# Altium PCB CNC Machine Breakout.PcbDoc
Units mil, origin at the board's own origin, x right, y up, seen from the top; angles counter-clockwise.
Board outline 6000 x 4000 mil, 2 copper layers (Top Layer, Bottom Layer); 44 components, 74 nets, 227 pads, 85 vias.
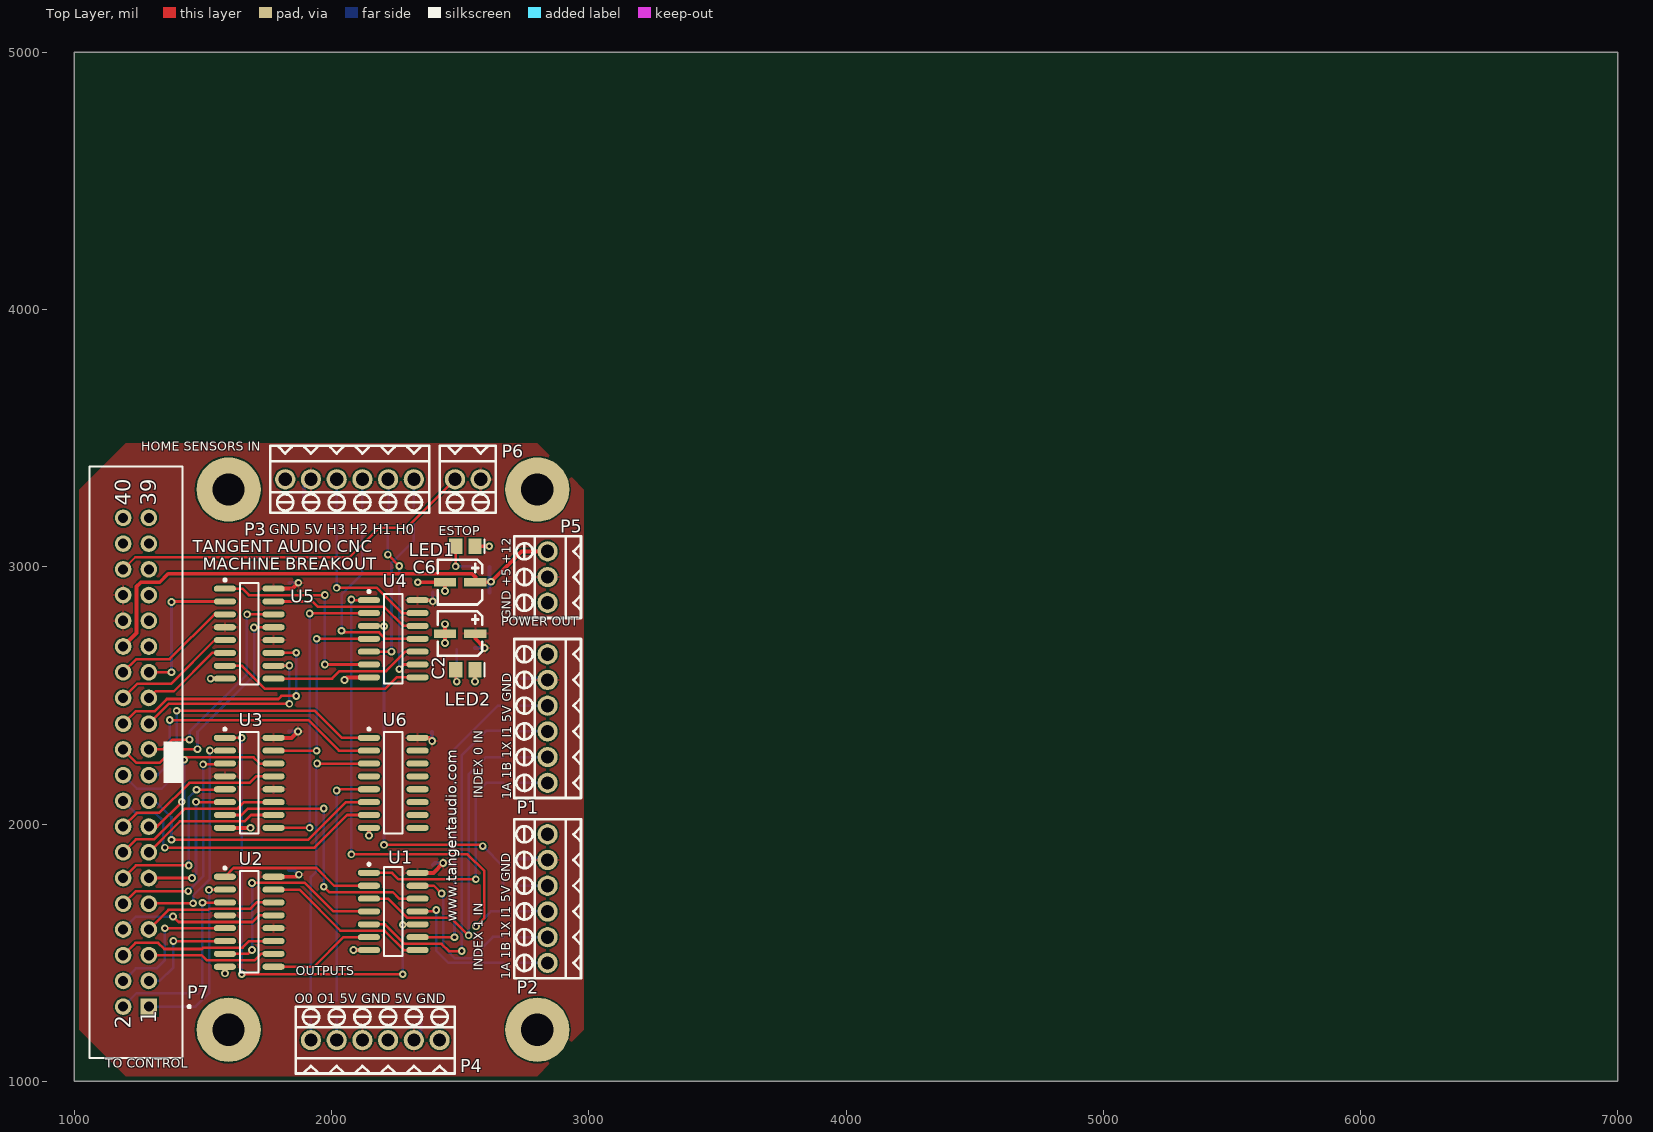
[diagram p0: Top Layer view]
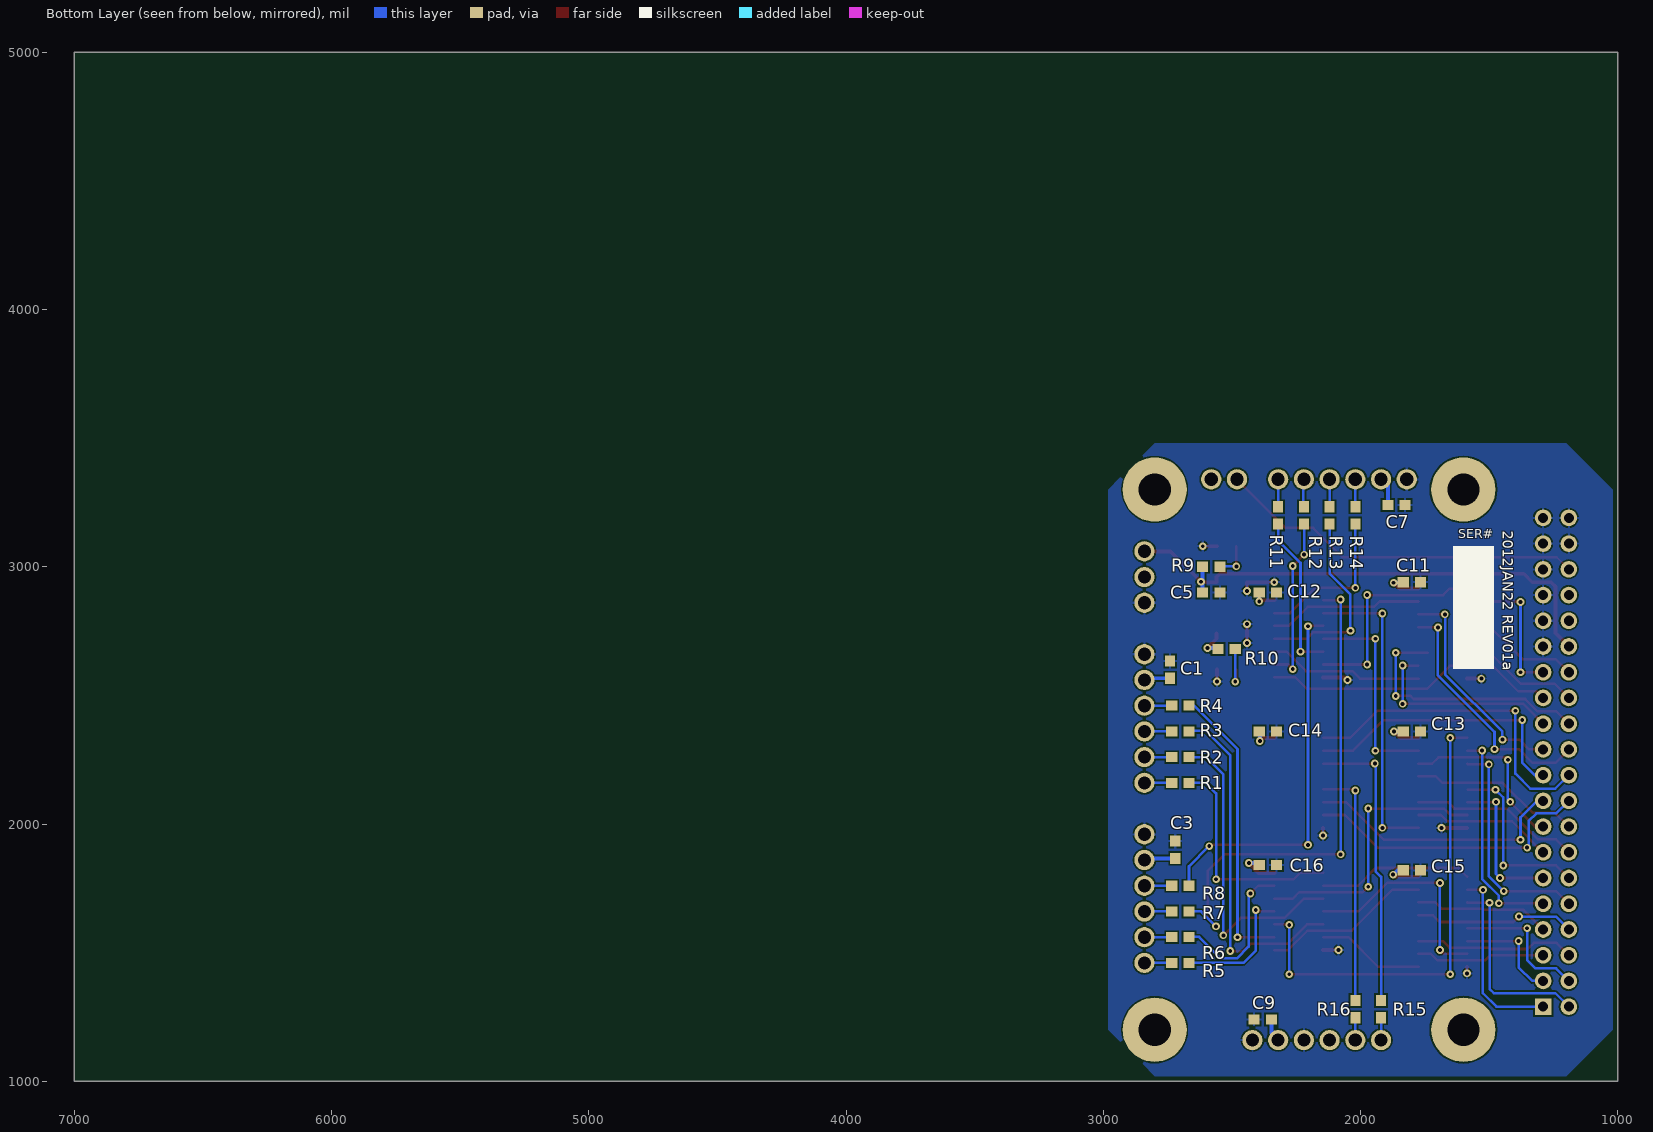
[diagram p1: Bottom Layer view, seen from below]

## Layer stack, top to bottom
Top Layer: signal copper 1.4
Dielectric: dielectric 12.6, FR-4, Dk 4.8
Bottom Layer: signal copper 1.4

## Board outline
1000,1000 7000,1000 7000,5000 1000,5000

## Design rules (kind name [scope] priority, off if disabled: settings)
Clearance [All] p1: gap=6
ComponentClearance [All] p1: gap=10 collisioncheckmode=3 verticalgap=10
HoleSize [All] p1: absolutevalues=TRUE maxlimit=125 minlimit=13 maxpercent=80.000 minpercent=20.000
MinimumAnnularRing [All] p1: minimumring=7
PolygonConnect [All] p1: connectstyle=Relief reliefconductorwidth=10 reliefentries=4 polygonreliefangle="90 Angle"
RoutingVias [All] p1: holewidth=20 width=30 viastyle="Through Hole" minholewidth=20 minwidth=30 maxholewidth=20 maxwidth=30
SolderMaskExpansion [All] p1: expansion=4
TestPointUsage [All] p1: valid=0 allowmultiple=FALSE
Testpoint [All] p1: side=15 testpointundercomponent=TRUE minsize=40 maxsize=100 preferedsize=60 minholesize=0 maxholesize=40 preferedholesize=32 testpointgrid=1 style=1023 order=0123456789
Width [All] p1: maxlimit=30 minlimit=6 preferedwidth=8 minimp=50.000000 maximp=50.000000 favimp=50.000000
17 further rules are at their usual default settings.

## Components (designator, comment, footprint, x,y, rotation, side; value= is the part's Value field where it differs from the comment)
C1 "Cap Semi" 1608[0603] 2740,2600 r90 bottom
C2 "Cap Pol3" Panasonic_HA_B 2500,2740 r0 top
C3 "Cap Semi" 1608[0603] 2720,1900 r90 bottom
C5 "Cap Semi" 1608[0603] 2580,2900 r180 bottom
C6 "Cap Pol3" Panasonic_HA_B 2500,2940 r0 top
C7 "Cap Semi" 1608[0603] 1860,3240 r180 bottom
C9 "Cap Semi" 1608[0603] 2380,1240 r0 bottom
C11 "Cap Semi" 1608[0603] 1800,2940 r180 bottom
C12 "Cap Semi" 1608[0603] 2360,2900 r180 bottom
C13 "Cap Semi" 1608[0603] 1800,2360 r180 bottom
C14 "Cap Semi" 1608[0603] 2360,2360 r180 bottom
C15 "Cap Semi" 1608[0603] 1800,1820 r180 bottom
C16 "Cap Semi" 1608[0603] 2360,1840 r180 bottom
LED1 "LED3" CD2012-0805 2520,3080 r0 top
LED2 "LED3" CD2012-0805 2520,2600 r0 top
P1 "Header 6" OSTVN06A150 2840,2160 r90 top
P2 "Header 6" OSTVN06A150 2840,1460 r90 top
P3 "Header 6" OSTVN06A150 2320,3340 r180 top
P4 "Header 6" OSTVN06A150 1920,1160 r0 top
P5 "Header 3" OSTVN03A150 2840,2860 r90 top
P6 "Header 2" OSTVN02A150 2580,3340 r180 top
P7 "Header 20X2" IDC2.54-V40D 1240,2240 r90 top
R1 "Res3" J1-0603 2700,2160 r180 bottom
R2 "Res3" J1-0603 2700,2260 r180 bottom
R3 "Res3" J1-0603 2700,2360 r180 bottom
R4 "Res3" J1-0603 2700,2460 r180 bottom
R5 "Res3" J1-0603 2700,1460 r180 bottom
R6 "Res3" J1-0603 2700,1560 r180 bottom
R7 "Res3" J1-0603 2700,1660 r180 bottom
R8 "Res3" J1-0603 2700,1760 r180 bottom
R9 "Res3" J1-0603 2580,3000 r180 bottom
R10 "Res3" J1-0603 2520,2680 r180 bottom
R11 "Res3" J1-0603 2320,3200 r270 bottom
R12 "Res3" J1-0603 2220,3200 r270 bottom
R13 "Res3" J1-0603 2120,3200 r270 bottom
R14 "Res3" J1-0603 2020,3200 r270 bottom
R15 "Res3" J1-0603 1920,1280 r90 bottom
R16 "Res3" J1-0603 2020,1280 r90 bottom
U1 "74ACT14SC" M14A_N 2240,1660 r0 top
U2 "MC3487D" D016_N 1680,1620 r0 top
U3 "MC3487D" D016_N 1680,2160 r0 top
U4 "74ACT14SC" M14A_N 2240,2720 r0 top
U5 "MC3487D" D016_N 1680,2740 r0 top
U6 "MC3486D" D016_N 2240,2160 r0 top

## Footprints (in the part's own frame and the unit in brackets; to place one, negate y for a bottom-side part, rotate by r counter-clockwise, add the part's x,y. Pads: shape width x height; smd on the part's side, far side on the other; paste and mask are expansions set on the pad)
1608[0603] [mm] "Chip Capacitor; Body 1.6 x 0.8 mm (LxW typ)"
  rect 1.1x1 smd: 1(-0.85,0) 2(0.85,0)
CD2012-0805 [mm] "Chip Diode; Body 2.0 x 1.3 mm (LxW typ)"
  rect 1.3x1.5 smd: 1(-0.95,0) 2(0.95,0)
  silkscreen extent 1.9,-0.65 1.9,0.65
D016_N [mm] "SOIC, 16-Leads, Body 9.9x3.9mm, Pitch 1.27mm, IPC Medium Density"
  oval 2.2x0.6 smd: 1(-2.4,4.445) 2(-2.4,3.175) 3(-2.4,1.905) 4(-2.4,0.635) 5(-2.4,-0.635) 6(-2.4,-1.905) 7(-2.4,-3.175) 8(-2.4,-4.445) 9(2.4,-4.445) 10(2.4,-3.175) 11(2.4,-1.905) 12(2.4,-0.635) 13(2.4,0.635) 14(2.4,1.905) 15(2.4,3.175) 16(2.4,4.445)
  silkscreen extent -2.52,-5 0.9,5.42, body extent -1.95,-4.95 1.95,4.95, height 1.75
IDC2.54-V40D [mm] "Connector; IDC, Low Profile Male Header, Thru-Hole; 40 Position; Vertical; Pitch 2.54 mm; Body 58.42 x 9.2 x 9.45 mm (LxWxH)"
  rect 1.65x1.65 hole 1: 1(-24.13,-1.27)
  round 1.65 hole 1: 2(-24.13,1.27) 3(-21.59,-1.27) 4(-21.59,1.27) 5(-19.05,-1.27) 6(-19.05,1.27) 7(-16.51,-1.27) 8(-16.51,1.27) 9(-13.97,-1.27) 10(-13.97,1.27) 11(-11.43,-1.27) 12(-11.43,1.27) 13(-8.89,-1.27) 14(-8.89,1.27) 15(-6.35,-1.27) 16(-6.35,1.27) 17(-3.81,-1.27) 18(-3.81,1.27) 19(-1.27,-1.27) 20(-1.27,1.27) 21(1.27,-1.27) 22(1.27,1.27) 23(3.81,-1.27) 24(3.81,1.27) 25(6.35,-1.27) 26(6.35,1.27) 27(8.89,-1.27) 28(8.89,1.27) 29(11.43,-1.27) 30(11.43,1.27) 31(13.97,-1.27) 32(13.97,1.27) 33(16.51,-1.27) 34(16.51,1.27) 35(19.05,-1.27) 36(19.05,1.27) 37(21.59,-1.27) 38(21.59,1.27) 39(24.13,-1.27) 40(24.13,1.27)
  silkscreen extent -29.21,-5.38 29.21,4.6, body extent -29.21,-4.6 29.21,4.6, height 9.45
J1-0603 [mm] "Chip Resistor; Body 1.6 x 0.8 mm (LxW typ)"
  rect 1.1x1 smd: 1(-0.85,0) 2(0.85,0)
M14A_N [mm] "SOIC, 14-Leads, Body 8.6x3.9mm, Pitch 1.27mm, IPC Medium Density"
  oval 2.2x0.6 smd: 1(-2.4,3.81) 2(-2.4,2.54) 3(-2.4,1.27) 4(-2.4,0) 5(-2.4,-1.27) 6(-2.4,-2.54) 7(-2.4,-3.81) 8(2.4,-3.81) 9(2.4,-2.54) 10(2.4,-1.27) 11(2.4,0) 12(2.4,1.27) 13(2.4,2.54) 14(2.4,3.81)
  silkscreen extent -2.52,-4.4 0.9,4.78, body extent -1.95,-4.33 1.95,4.33, height 1.75
OSTVN02A150 [mm]
  round 2 hole 1.3: 1(0,0) 2(2.54,0)
  silkscreen extent -1.5,-3.3 4.04,3.3
OSTVN03A150 [mm]
  round 2 hole 1.3: 1(0,0) 2(2.54,0) 3(5.08,0)
  silkscreen extent -1.5,-3.3 6.58,3.3
OSTVN06A150 [mm] "On-Shore Technology 2.54mm Screw Terminal"
  round 2 hole 1.3: 1(0,0) 2(2.54,0) 3(5.08,0) 4(7.62,0) 5(10.16,0) 6(12.7,0)
  silkscreen extent -1.5,-3.3 14.2,3.3
Panasonic_HA_B [mm]
  rect 2.2x0.85 smd: 1(1.5,0) 2(-1.5,0)
  silkscreen extent -2.2,-2.2 2.2,2.2

## Part data
C1 C3 C5 C7 C9 C11 C12 C13 C14 C15 C16: "Capacitor (Semiconductor SIM Model)"
C2 C6: "Polarized Capacitor (Surface Mount)"
LED1 LED2: "Typical BLUE SiC LED"
P1 P2 P3 P4: "Header, 6-Pin"
P5: "Header, 3-Pin"
P6: "Header, 2-Pin"
P7: "Header, 20-Pin, Dual row"
R1 R2 R3 R4 R5 R6 R7 R8 R9 R10 R11 R12 R13 R14 R15 R16: "Resistor"
U1 U4: "Hex Inverter with Schmitt Trigger Input"
U2 U3 U5: "Quadruple Differential Line Driver with 3-State Output"
U6: "Quadruple Line Receiver with 3-State Output"

## Free pads (board coordinates)
  round 250 hole 125: ""(1600,1200) ""(1600,3300) ""(2800,1200) ""(2800,3300)

## Via types
v1: diameter 30, hole 15, Top Layer to Bottom Layer, 73 vias
v2: diameter 30, hole 15, Top Layer to Bottom Layer, tented both sides, 12 vias

## Nets (pads, with @x,y where several pads share a name; then routed paths per layer and width w, separated by ;. In a path a pad name is that pad's centre, name@x,y a point inside that pad or via, vN(x,y) a via of type N, cw(c..) or ccw(c..) an arc to the next point about the centre after c; other vN are vias at no path point)
+12V: C5.1 C6.1 P5.3 P7.30 R9.1 | length 2054.8
  Top Layer w15: P7.30 1242,2742 1242,2923 1259,2940 1332,2940 1365,2973 2546,2973 2559.06,2959.94 C6.1 2618,2940 2738,3060 P5.3
  Bottom Layer w15: C5.1 R9.1 ; v2@2613.46,2942 v2(2620,2942)
ENC0_A_IN: P1.1 R1.1 | length 106.5
  Bottom Layer w10: R1.1 P1.1
ENC0_B_IN: P1.2 R2.1 | length 106.5
  Bottom Layer w10: R2.1 P1.2
ENC0_IDX_IN: P1.3 R3.1 | length 106.5
  Bottom Layer w10: R3.1 P1.3
ENC1_A_IN: P2.1 R5.1 | length 106.5
  Bottom Layer w10: R5.1 P2.1
ENC1_B_IN: P2.2 R6.1 | length 106.5
  Bottom Layer w10: R6.1 P2.2
ENC1_IDX_IN: P2.3 R7.1 | length 106.5
  Bottom Layer w10: R7.1 P2.3
GND: C1.2 C2.2 C3.2 C5.2 C6.2 C7.2 C9.2 C11.2 C12.2 C13.2 C14.2 C15.2 C16.2 LED1.2 LED2.2 P1.6 P2.6 P3.6 P4.4 P4.6 P5.1 P7.29 P7.31 P7.33 P7.35 P7.37 P7.38 P7.39 P7.40 U1.7 U2.8 U3.8 U4.7 U5.8 U6.8 | length 685.2
  Top Layer w15: v1(1530,2565) U5.8 ; v1(1585.51,1419.49) U2.8 ; U3.8 v2(1685,1985) ; v1(2050,2560) 2060,2570 U4.7 ; v1(2085,1510) U1.7 ; v1(2145.51,1955.51) U6.8 ; v1(2335,2940) C6.2 v1(2440.95,2905.95) ; v1(2440.94,2703.94) v1(2440.94,2776.94) ; v1(2557.4,2553.6) LED2.2 ; LED1.2 v2(2613,3080)
HOME0_IN: P3.1 R11.1 | length 106.5
  Bottom Layer w10: R11.1 P3.1
HOME1_IN: P3.2 R12.1 | length 113
  Bottom Layer w10: R12.1@2222,3225 P3.2@2222,3338
HOME2_IN: P3.3 R13.1 | length 106.5
  Bottom Layer w10: R13.1 P3.3
HOME3_IN: P3.4 R14.1 | length 106.5
  Bottom Layer w10: R14.1 P3.4
MACHINE_ESTOP: P6.2 P7.36 | length 1435
  Top Layer w10: P7.36 1237,3037 2070,3037 2184,3151 2291,3151 P6.2
NetLED1_1: LED1.1 R9.2 | length 143.1
  Top Layer w10: v1(2482.6,3001.5) LED1.1
  Bottom Layer w10: v1@2484.1,3000 v1(2482.6,3001.5) R9.2@2545.04,3001.5
NetLED2_1: LED2.1 R10.2 | length 174.6
  Top Layer w10: LED2.1 2482.6,2557.47 v1(2486.54,2553.54)
  Bottom Layer w10: v1(2486.54,2553.54) R10.2
NetP7_1: P7.1 U2.2 | length 719.5
  Top Layer w10: v1(1524,1744) 1525,1745 U2.2
  Bottom Layer w10: P7.1 1472,1290 1524,1342 v1(1524,1744)
NetP7_2: P7.2 U2.3 | length 759.5
  Top Layer w10: v1(1498,1694) 1584.51,1694 U2.3
  Bottom Layer w10: P7.2 1242,1342 1481,1342 1498,1359 v1(1498,1694)
NetP7_3: P7.3 U2.6 | length 419.5
  Top Layer w10: v1(1385,1545) U2.6
  Bottom Layer w10: P7.3 1332,1390 1385,1443 v1(1385,1545)
NetP7_4: P7.4 U2.5 | length 552.5
  Top Layer w10: v1(1352,1595) U2.5
  Bottom Layer w10: P7.4 1239,1439 1319,1439 1352,1472 v1(1352,1595)
NetP7_5: P7.5 U2.10 | length 503.1
  Top Layer w10: P7.5 1495,1490 1515,1470 1701,1470 1726,1495 U2.10
NetP7_6: P7.6 U2.11 | length 627.2
  Top Layer w10: P7.6 1238,1538 1326,1538 1350,1514 1496,1514 1501,1519 1654,1519 1680,1545 U2.11
NetP7_7: P7.7 U2.14 | length 528
  Top Layer w10: P7.7 1366,1666 1520,1666 1525,1671 1685,1671 1709,1695 U2.14
NetP7_8: P7.8 U2.13 | length 624.7
  Top Layer w10: v1(1384,1640) 1405,1619 1692,1619 1718,1645 U2.13
  Bottom Layer w10: P7.8 1240,1640 v1(1384,1640)
NetP7_9: P7.9 U3.2 | length 852.7
  Top Layer w10: P7.9 1292,1692 v1(1462.06,1692) ; v1(1527,2286) 1528,2285 U3.2
  Bottom Layer w10: v1(1462.06,1692) 1462.06,1721.06 1527,1786 v1(1527,2286)
NetP7_10: P7.10 U3.3 | length 876.2
  Top Layer w10: P7.10 1239,1739 v1(1443.24,1739) ; v1(1501,2232) 1582.51,2232 U3.3
  Bottom Layer w10: v1(1443.24,1739) 1501,1796.76 v1(1501,2232)
NetP7_11: P7.11 U3.6 | length 582.8
  Top Layer w10: P7.11 v1(1457.47,1790) ; v1(1473,2086) 1474,2085 U3.6
  Bottom Layer w10: v1(1457.47,1790) 1473,1805.53 v1(1473,2086)
NetP7_12: P7.12 U3.5 | length 690.2
  Top Layer w10: P7.12 1239,1839 v1(1445,1839) ; v1(1475,2133) U3.5@1583.51,2133
  Bottom Layer w10: v1(1445,1839) 1445,2103 v1(1475,2133)
NetP7_13: P7.13 U3.10 | length 544.5
  Top Layer w10: P7.13 1410,2010 1662,2010 1687,2035 U3.10
NetP7_14: P7.14 U3.11 | length 665.3
  Top Layer w10: P7.14 1240,1940 1310,1940 1430,2060 1635,2060 1660,2085 U3.11
NetP7_15: P7.15 U3.14 | length 696.6
  Top Layer w10: P7.15 1322,1990 v1(1418,2086) ; v1(1427,2250) 1436,2259 1697,2259 1721,2235 U3.14
  Bottom Layer w10: v1(1418,2086) 1427,2095 v1(1427,2250)
NetP7_16: P7.16 U3.13 | length 665.3
  Top Layer w10: P7.16 1243,2043 1330,2043 1447,2160 1682,2160 1707,2185 U3.13
NetP7_17: P7.17 U6.6 | length 1029.5
  Top Layer w10: v1(1378,1939) 1910,1939 2056,2085 U6.6
  Bottom Layer w10: P7.17 1314,2090 1378,2026 v1(1378,1939)
NetP7_18: P7.18 U6.7 | length 1140.3
  Top Layer w10: v1(1352,1908) 1934,1908 2061,2035 U6.7
  Bottom Layer w10: P7.18 1239,2041 1316,2041 1346,2011 1346,1914 v1(1352,1908)
NetP7_19: P7.19 U6.2 | length 1090.7
  Top Layer w10: v1(1371,2404) 1910,2404 2029,2285 U6.2
  Bottom Layer w10: P7.19 1323,2190 1371,2238 v1(1371,2404)
NetP7_20: P7.20 U6.1 | length 1289.4
  Top Layer w10: v1(1398,2440) 1935,2440 2040,2335 U6.1
  Bottom Layer w10: P7.20 1243,2137 1339,2137 1398,2196 v1(1398,2440)
NetP7_21: P7.21 U5.14 | length 856
  Top Layer w10: P7.21 1344,2290 1382,2328 v1(1448,2328) ; v2(1672,2815) U5.14
  Bottom Layer w10: v1(1448,2328) 1448,2359 1671,2582 1671,2814 v2(1672,2815)
NetP7_22: P7.22 U5.13 | length 972.5
  Top Layer w10: P7.22 1242,2238 1331,2238 1384,2291 v1(1479,2291) ; v2(1699,2764) 1700,2765 U5.13
  Bottom Layer w10: v1(1479,2291) 1479,2358 1699,2578 v2(1699,2764)
NetP7_23: P7.23 U5.10 | length 787.4
  Top Layer w10: P7.23 1367,2467 v1(1836,2467) ; U5.10@1775.49,2616 v1(1836,2616)
  Bottom Layer w10: v1(1836,2467) v1(1836,2616)
NetP7_24: P7.24 U5.11 | length 1008.7
  Top Layer w10: P7.24 1239,2439 1313,2439 1360,2486 1793,2486 1805,2498 v1(1863,2498) ; U5.11@1739,2665 U5.11 ; U5.11@1775.49,2666 v1(1863,2666)
  Bottom Layer w10: v1(1863,2498) v1(1863,2666)
NetP7_25: P7.25 U5.6 | length 368
  Top Layer w10: P7.25 1316,2516 1387,2516 1536,2665 U5.6
NetP7_26: P7.26 U5.5 | length 488.7
  Top Layer w10: P7.26 1246,2546 1377,2546 1546,2715 U5.5
NetP7_27: P7.27 U5.2 | length 569.3
  Top Layer w10: P7.27 v1(1378,2590) ; v1(1378,2863) 1380,2865 U5.2
  Bottom Layer w10: v1(1378,2590) v1(1378,2863)
NetP7_28: P7.28 U5.3 | length 488.7
  Top Layer w10: P7.28 1241,2641 1371,2641 1545,2815 U5.3
NetR1_2: R1.2 U1.1 | length 882.4
  Top Layer w10: U1.1 2235,1810 2260,1785 v1(2561,1785)
  Bottom Layer w10: v1(2561,1785) 2561,2119 2602,2160 R1.2
NetR2_2: R2.2 U1.3 | length 1234
  Top Layer w10: U1.3 2220,1710 2295,1635 2465,1635 v1(2533,1567)
  Bottom Layer w10: v1(2533,1567) 2533,2193 2600,2260 R2.2
NetR3_2: R3.2 U1.5 | length 1365.3
  Top Layer w10: U1.5 2208,1610 2284,1534 2428,1534 2456,1506 v1(2506,1506)
  Bottom Layer w10: v1(2506,1506) 2506,2267 2601,2362 2664.54,2362 R3.2
NetR4_2: R4.2 U1.9 | length 1133
  Top Layer w10: U1.9 v1(2478,1560)
  Bottom Layer w10: v1(2478,1560) 2478,2291 2647,2460 R4.2
NetR5_2: R5.2 U1.11 | length 512.4
  Top Layer w10: U1.11 2392,1660 2398,1666 v1(2407,1666)
  Bottom Layer w10: v1(2407,1666) 2407,1508 2455,1460 R5.2
NetR6_2: R6.2 U1.13 | length 600.8
  Top Layer w10: U1.13 2398,1760 v1(2428,1730)
  Bottom Layer w10: v1(2428,1730) 2435,1723 2435,1523 2480,1478 2544,1478 2627,1561 2665.54,1561 R6.2
NetR7_2: R7.2 U4.1 | length 1961.5
  Top Layer w10: v1(2077,1882) 2529,1882 2594,1817 2594,1634 v1(2562,1602) ; v1(2077,2873) 2080,2870 U4.1
  Bottom Layer w10: v1(2077,1882) v1(2077,2873) ; v1(2562,1602) 2620,1660 R7.2
NetR8_2: R8.2 U4.3 | length 1481.5
  Top Layer w10: U4.3 2203,2770 v2(2204,2769) ; v1(2204,1919) 2583,1919 v1(2588,1914)
  Bottom Layer w10: v1(2204,1919) v2(2204,2769) ; v1(2588,1914) 2666.54,1835.46 R8.2
NetR11_2: R11.2 U4.5 | length 620.1
  Top Layer w10: U4.5 v2(2233,2670)
  Bottom Layer w10: v2(2233,2670) 2233,3015 2320,3102 R11.2
NetR12_2: R12.2 U4.9 | length 662.1
  Top Layer w10: v1(2219,3047) v1(2263,3003) ; v2(2263,2602) 2281,2620 U4.9
  Bottom Layer w10: v1(2219,3047) 2219,3165.54 R12.2 ; v2(2263,2602) v1(2263,3003)
NetR13_2: R13.2 U4.11 | length 757.4
  Top Layer w10: v1(2039,2751) 2045,2745 2185,2745 2210,2720 U4.11
  Bottom Layer w10: v1(2039,2751) 2039,2893 2120,2974 R13.2
NetR14_2: R14.2 U4.13 | length 603.6
  Top Layer w10: v1(2020,2918) 2176,2918 2274,2820 U4.13
  Bottom Layer w10: v1(2020,2918) R14.2
NetR15_2: R15.2 U6.3 | length 1133
  Top Layer w10: v1(1944,2235) U6.3
  Bottom Layer w10: R15.2 1920,1794 1941,1815 1941,2232 v1(1944,2235)
NetR16_2: R16.2 U6.5 | length 944.1
  Top Layer w10: v1(2020,2130) 2025,2135 U6.5
  Bottom Layer w10: R16.2 v1(2020,2130)
NetU1_2: U1.2 U2.1 | length 602.7
  Top Layer w10: U2.1 1619.51,1829 1941,1829 2010,1760 U1.2
NetU1_4: U1.4 U2.7 | length 873.2
  Top Layer w10: U2.7 1676,1495 v2(1691,1510) ; v2(1691,1771) 1896,1771 2007,1660 U1.4
  Bottom Layer w10: v2(1691,1510) v2(1691,1771)
NetU1_6: U1.6 U2.9 | length 418.7
  Top Layer w10: U2.9 1932,1445 2047,1560 U1.6
NetU1_8: U1.8 U2.15 | length 657.3
  Top Layer w10: U2.15 1875,1745 2035,1585 2206,1585 2281,1510 U1.8
NetU1_10: U1.10 U3.1 | length 1860.8
  Top Layer w10: U3.1 v2(1651,2335) ; v2(1651,1416) v1(2277,1416) ; v1(2277,1608) 2279,1610 U1.10
  Bottom Layer w10: v2(1651,1416) v2(1651,2335) ; v1(2277,1416) v1(2277,1608)
NetU1_12: U1.12 U3.7 | length 1082.4
  Top Layer w10: U3.7 1650,2035 1675,2060 v1(1970,2060) ; v1(1970,1756) 1991,1735 2238,1735 2263,1710 U1.12
  Bottom Layer w10: v1(1970,1756) v1(1970,2060)
NetU3_9: U3.9 U4.2 | length 1204.9
  Top Layer w10: U3.9 v1(1915,1985) ; v1(1915,2818) 1917,2820 U4.2
  Bottom Layer w10: v1(1915,1985) v1(1915,2818)
NetU3_15: U3.15 U4.4 | length 806
  Top Layer w10: U3.15 v1(1942,2285) ; v1(1942,2720) U4.4
  Bottom Layer w10: v1(1942,2285) v1(1942,2720)
NetU4_6: U4.6 U5.1 | length 840.4
  Top Layer w10: U5.1 1654,2915 1679,2890 v1(1974,2890) ; v1(1974,2620) U4.6
  Bottom Layer w10: v1(1974,2620) v1(1974,2890)
NetU4_8: U4.8 U5.7 | length 804.9
  Top Layer w10: U5.7 1652,2615 1742,2525 2208,2525 2253,2570 U4.8
NetU4_10: U4.10 U5.9 | length 603.5
  Top Layer w10: U5.9 2002,2565 2031,2594 2212,2594 2288,2670 U4.10
NetU4_12: U4.12 U5.15 | length 599.4
  Top Layer w10: U5.15 1926,2865 1947,2844 2205,2844 2279,2770 U4.12
SPARE0_IN: P1.4 R4.1 | length 106.5
  Bottom Layer w10: R4.1 P1.4
SPARE0_OUT: P4.1 R15.1 | length 86.5
  Bottom Layer w10: P4.1 R15.1
SPARE1_IN: P2.4 R8.1 | length 106.5
  Bottom Layer w10: R8.1 P2.4
SPARE1_OUT: P4.2 R16.1 | length 86.5
  Bottom Layer w10: P4.2 R16.1
VCC: C1.1 C2.1 C3.1 C7.1 C9.1 C11.1 C12.1 C13.1 C14.1 C15.1 C16.1 P1.5 P2.5 P3.5 P4.3 P4.5 P5.2 P6.1 P7.32 P7.34 R10.1 U1.14 U2.4 U2.12 U2.16 U3.4 U3.12 U3.16 U4.14 U5.4 U5.12 U5.16 U6.16 | length 1282.5
  Top Layer w15: U2.16 1864,1795 1873,1804 v1(1873,1803) ; U3.16 1845,2335 v1(1870,2360) ; U5.16 1848,2915 v1(1871,2938) ; U1.14 2396,1810 v1(2434,1848) ; U6.16 2379,2335 v1(2391,2323) ; U4.14 2389,2870 v1(2393.47,2865.53) ; C2.1 2559.06,2719.94 v1(2595,2684)
  Bottom Layer w15: C15.1 1856,1820 v1(1873,1803) ; C13.1 v1(1870,2360) ; C11.1@1835.46,2938 v1(1871,2938) ; C7.1 P3.5@1893.46,3313.46 ; P4.5 2346.54,1186.54 C9.1 ; v1(2391,2323) C14.1@2391,2357.54 ; C16.1 2401.46,1848 v1(2434,1848) ; v1(2393.47,2865.53) C12.1 ; R10.1@2557.46,2684 v1(2595,2684) ; C3.1 2833.46,1866.54 P2.5 ; C1.1 2833.46,2566.54 P1.5
pads on no net: U6.4 U6.9 U6.10 U6.11 U6.12 U6.13 U6.14 U6.15

## Polygon pours and split planes (outlines as drawn)
VCC on Top Layer "Bottom Layer-No Net" (solid, remove dead copper, pour order 1000): 1200,1020 2800,1020 2980,1200 2980,3300 2800,3480 1200,3480 1020,3300 1020,1200 1200,1020
GND on Bottom Layer "Bottom Layer-No Net" (solid, remove dead copper, pour order 1001): 1200,1020 2800,1020 2980,1200 2980,3300 2800,3480 1200,3480 1040,3320 1020,3300 1020,1200 1200,1020

## Silkscreen, mask and mechanical layers (free items; w line width, h text height)
Top Overlay:
  text "HOME SENSORS IN" at 1260,3440 h60
  text "GND 5V H3 H2 H1 H0" at 1757,3112 h65
  text "ESTOP" at 2417,3110 h60
  text "TANGENT AUDIO CNC" at 1460,3040 h80
  text "MACHINE BREAKOUT" at 1500,2973 h80
  text "GND +5 +12" at 2709,2796 h60 r90
  text "POWER OUT" at 2660,2760 h60
  text "INDEX 0 IN" at 2600,2100 h60 r90
  text "1A 1B 1X I1 5V GND" at 2710.08,2095.95 h60 r90
  text "www.tangentaudio.com" at 2500,1620 h70 r90
  text "INDEX 1 IN" at 2600,1430 h60 r90
  text "OUTPUTS" at 1860,1400 h60
  text "1A 1B 1X I1 5V GND" at 2707,1396 h60 r90
  text "O0 O1 5V GND 5V GND" at 1857,1290 h62
  text "TO CONTROL" at 1120,1040 h60
Bottom Overlay:
  region: 1480,3080 1480,2602.51 1640,2602.51 1640,3080
  text "2012JAN22 REV01a" at 1460,3140 h70 r90
  text "SER#" at 1620,3100 h60
Mechanical 1:
  lines w10: 1000,1200 ccw(c1200,1200) 1200,1000 2800,1000 ccw(c2800,1200) 3000,1200 3000,3300 ccw(c2800,3300) 2800,3500 1200,3500 ccw(c1200,3300) 1000,3300 1000,1200
Mechanical 13:
  lines w8: 1020,1200 1200,1020 2800,1020 2980,1200 2980,3300 2800,3480 1200,3480 1020,3300 1020,1200

## Text inside footprints (layer, text, board x,y; h text height)
P7: Top Overlay "39" at 1319.53,3237.24 h59.06 r90; Top Overlay "40" at 1219.53,3237.24 h59.06 r90; Top Overlay "1" at 1319.53,1223.08 h59.06 r90; Top Overlay "2" at 1219.53,1203.4 h59.06 r90